# Altium PCB TEMPLATE_PCB_2L.PcbDoc
Units mm, origin at the board's own origin, x right, y up, seen from the top; angles counter-clockwise.
Board outline 430 x 290 mm, 2 copper layers (Top, Bottom), stack 1.54 mm thick; 75 components, 46 nets, 349 pads, 26 vias.
Unrouted connection lines stored in the file: 1.
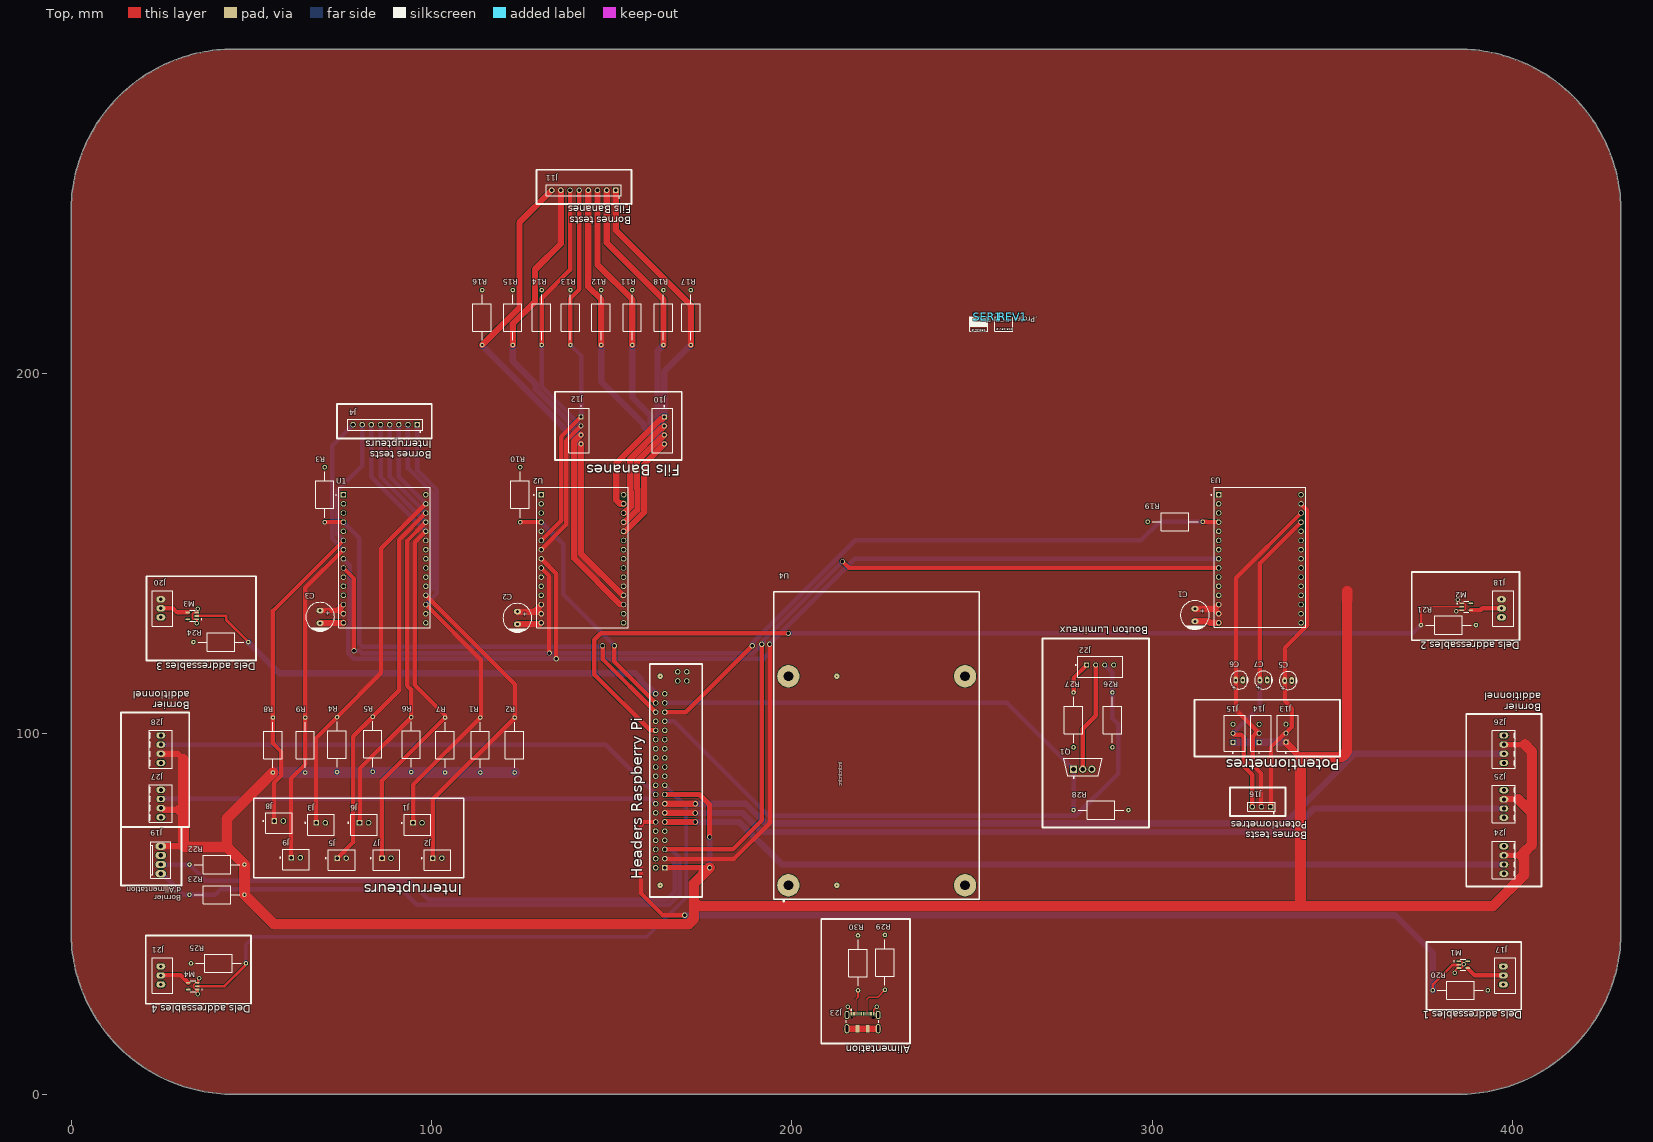
[diagram p0: Top view]
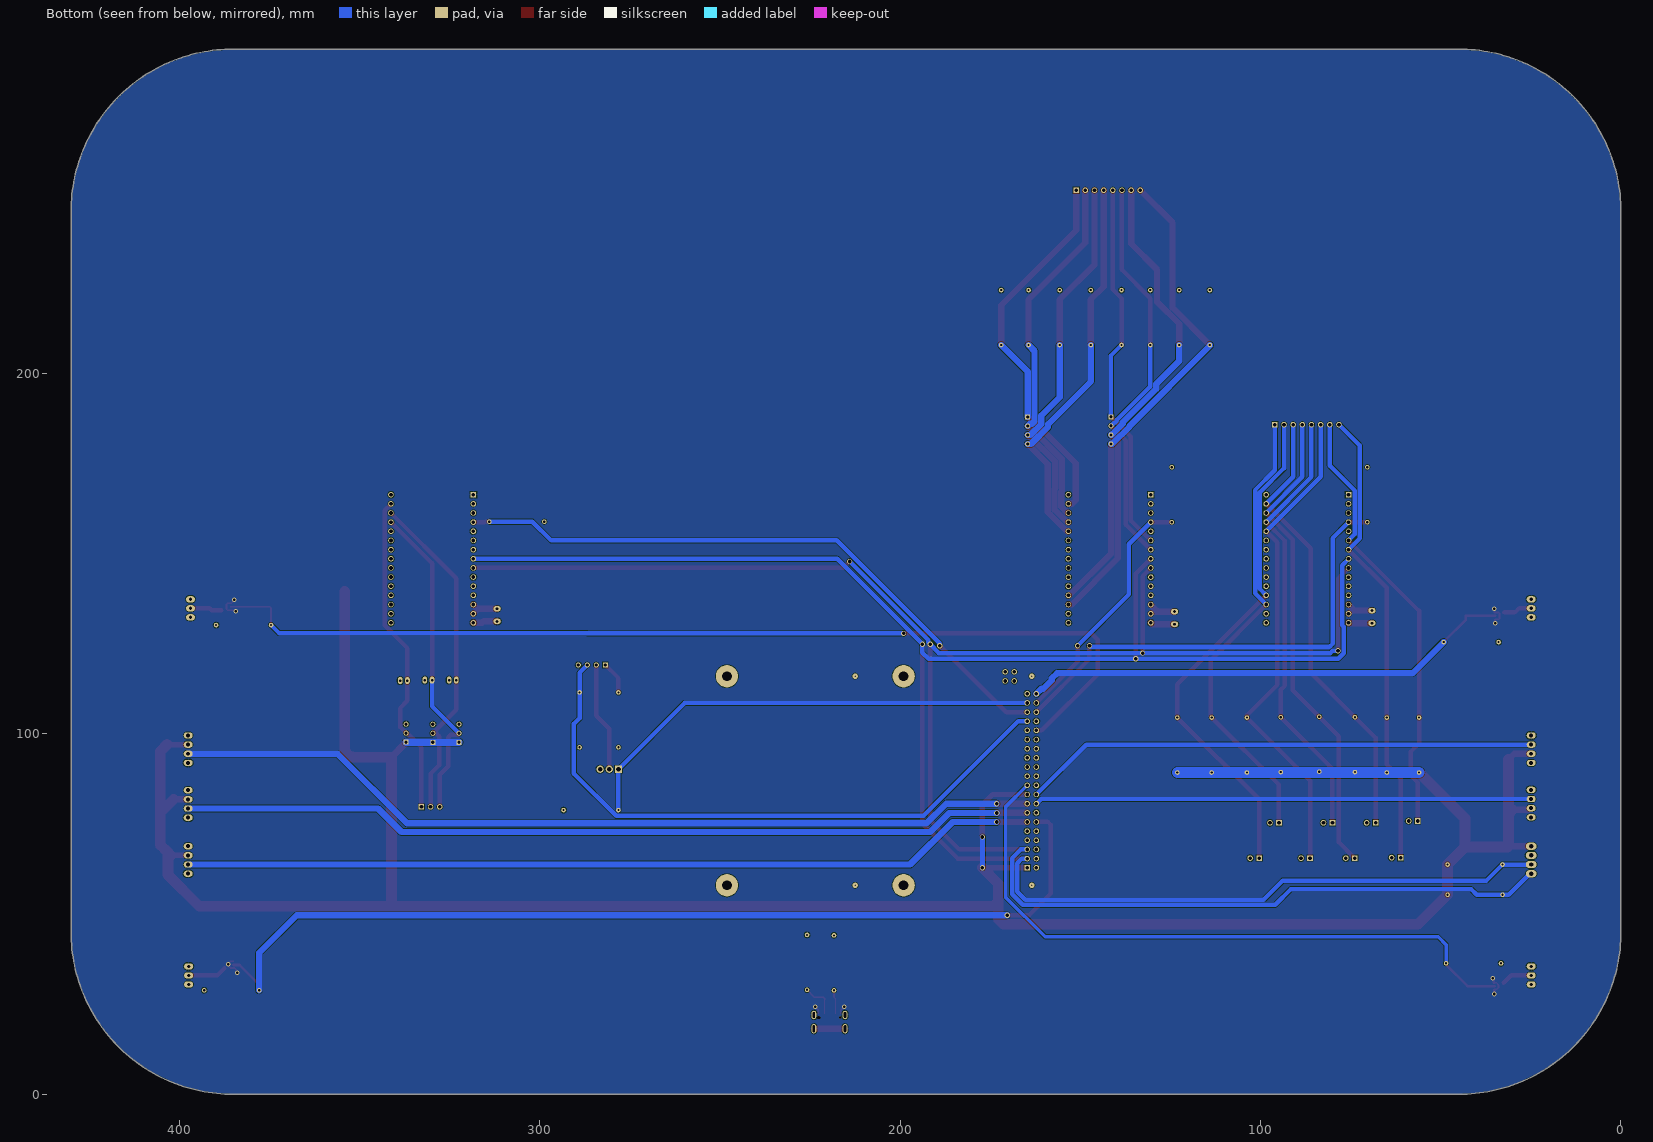
[diagram p1: Bottom view, seen from below]

## Layer stack, top to bottom
Top Solder: solder mask 0.0102, Solder Resist, Dk 3.5
Top: signal copper 0.035
Dielectric 1: core 1.47, FR-4, Dk 4.6
Bottom: signal copper 0.035
Bottom Solder: solder mask 0.0102, Solder Resist, Dk 3.5

## Board outline
0,45 0,245 cw(c45,245) 45,290 385,290 cw(c385,245) 430,245 430,45 cw(c385,45) 385,0 45,0 cw(c45,45)

## Design rules (kind name [scope] priority, off if disabled: settings)
BoardOutlineClearance [All] p1: gap=0.2 ignorepadtopadclearanceinfootprint=FALSE except(0: Arc-SplitContinuation Track-SplitContinuation SMDPad-SplitContinuation THPad-SplitContinuation Via-SplitContinuation Fill-SplitContinuation Poly-SplitContinuation Region-SplitContinuation Text-SplitContinuation)
Clearance [All] p1: gap=0.152 ignorepadtopadclearanceinfootprint=FALSE except(0: Arc-Hole Track-Hole SMDPad-Hole THPad-Hole Via-Hole Fill-Hole Poly-Hole Region-Hole Text-Hole; 0.127: Arc-Arc Arc-Track Track-Track SMDPad-Fill SMDPad-Poly SMDPad-Region; 0.2: Arc-SMDPad Track-SMDPad; 0.254: Arc-Via Track-Via Via-Via; 0.33: Arc-THPad Track-THPad; 0.5: THPad-THPad)
ComponentClearance [All] p1: gap=0.102 collisioncheckmode=3 verticalgap=0.102 showdistances=FALSE
HoleSize [All] p1: absolutevalues=TRUE maxlimit=6.3 minlimit=0.3 maxpercent=80.000 minpercent=20.000
HoleToHoleClearance [All] p1: gap=0.5 allowstackedmicrovias=FALSE
MinimumAnnularRing [All] p1: minimumring=0.1
MinimumSolderMaskSliver [All] p1: minsoldermaskwidth=0.1
PlaneClearance [All] p1: clearance=0.152
PlaneConnect [All] p1: pad.planeconnectstyle=Relief pad.reliefexpansion=0.508 pad.reliefentries=4 pad.reliefconductorwidth=0.254 pad.reliefairgap=0.254 via.planeconnectstyle=Direct via.reliefexpansion=0.508 via.reliefentries=4 via.reliefconductorwidth=0.254 via.reliefairgap=0.254
PolygonConnect [All] p1: thpad.connectstyle=Relief thpad.reliefconductorwidth=0.254 thpad.reliefentries=4 thpad.polygonreliefangle="90 Angle" thpad.airgapwidth=0.254 smdpad.connectstyle=Relief smdpad.reliefconductorwidth=0.254 smdpad.reliefentries=4 smdpad.polygonreliefangle="90 Angle" smdpad.airgapwidth=0.254 via.connectstyle=Direct via.reliefconductorwidth=0.254 via.reliefentries=4 via.polygonreliefangle="90 Angle" via.airgapwidth=0.254
RoutingVias [All] p1: holewidth=0.3 width=0.5 viastyle="Through Hole" minholewidth=0.3 minwidth=0.5 maxholewidth=6.3 maxwidth=6.5
SilkToSilkClearance [All] p1: silktosilkclearance=0.102
SilkToSolderMaskClearance [IsPad] p1: minsilkscreentomaskgap=0.024 clearancetoexposedcopper=FALSE
SolderMaskExpansion SolderMaskExpansion_Via [isVia] p1: expansion=0.102 istentingtop=TRUE
SolderMaskExpansion [All] p2: expansion=0.051 istentingtop=FALSE
Width [All] p1: maxlimit=25.4 minlimit=0.127 preferedwidth=0.152 minimp=50.000000 maximp=50.000000 favimp=50.000000
22 further rules are at their usual default settings.

## Classes and differential pairs
component class Alimentation_USB_Header: J23 R29 R30
component class Énigme3_Potentiomètres: C3 C5 C6 C7 J13 J14 J15 J16 R19 U3
component class Énigme2_Crocodile: C2 J10 J11 J12 R10 R11 R12 R13 R14 R15 R16 R17 R18 U2
component class Énigme1_Switch: C1 J1 J2 J3 J4 J5 J6 J7 J8 J9 R1 R2 R3 R4 R5 R6 R7 R8 R9 U1
component class Raspberry_Pi_4_ModelB: J17 J18 J19 J20 J21 J22 J24 J25 J26 J27 J28 ll M1 M2 M3 M4 Q1 R20 R21 R22 R23 R24 R25 R26 R27 R28 U4
component class Title_Page: REV1 SER1

## Components (designator, comment, footprint, x,y, rotation, side; value= is the part's Value field where it differs from the comment)
C1 "100 µF" "CAP AL TH D8 L3.5 H12.5" 311.785,132.969 r270 top
C2 "100 µF" "CAP AL TH D8 L3.5 H12.5" 123.825,132.179 r270 top
C3 "100 µF" "CAP AL TH D8 L3.5 H12.5" 69.088,132.461 r270 top
C5 "0.1µF" "CAP TH ALUM ELEC D5.00mm S2.00mm H12.00mm" 337.685,114.808 r180 top
C6 "0.1µF" "CAP TH ALUM ELEC D5.00mm S2.00mm H12.00mm" 324.104,114.944 r180 top
C7 "0.1µF" "CAP TH ALUM ELEC D5.00mm S2.00mm H12.00mm" 330.851,114.935 r180 top
J1 "B2B-XH-A(LF)(SN)" FP-B2B-XH-A_LF_SN-MFG 96.12,74.778 r0 top
J2 "B2B-XH-A(LF)(SN)" FP-B2B-XH-A_LF_SN-MFG 101.62,65.007 r0 top
J3 "B2B-XH-A(LF)(SN)" FP-B2B-XH-A_LF_SN-MFG 69.322,74.803 r0 top
J4 "CON_HDR_1X8" CON_HDR_1x8 87.122,185.801 r270 top
J5 "B2B-XH-A(LF)(SN)" FP-B2B-XH-A_LF_SN-MFG 75.077,65.007 r0 top
J6 "B2B-XH-A(LF)(SN)" FP-B2B-XH-A_LF_SN-MFG 81.28,74.803 r0 top
J7 "B2B-XH-A(LF)(SN)" FP-B2B-XH-A_LF_SN-MFG 87.503,65.007 r0 top
J8 "B2B-XH-A(LF)(SN)" FP-B2B-XH-A_LF_SN-MFG 57.658,75.303 r0 top
J9 "B2B-XH-A(LF)(SN)" FP-B2B-XH-A_LF_SN-MFG 62.377,65.134 r0 top
J10 "B4B-XH-A(LF)(SN)" FP-B4B-XH-A_LF_SN-MFG 164.067,184.17 r90 top
J11 "CON_HDR_1X8" CON_HDR_1x8 142.24,250.825 r270 top
J12 "B4B-XH-A(LF)(SN)" FP-B4B-XH-A_LF_SN-MFG 140.953,184.21 r90 top
J13 "B3B-XH-A(LF)(SN)" FP-B3B-XH-A_LF_SN-MFG 337.574,100.203 r90 top
J14 "B3B-XH-A(LF)(SN)" FP-B3B-XH-A_LF_SN-MFG 330.151,100.172 r90 top
J15 "B3B-XH-A(LF)(SN)" FP-B3B-XH-A_LF_SN-MFG 322.879,100.174 r90 top
J16 "CON_HDR_1X3" CON_HDR_1x3 330.258,79.756 r270 top
J17 "B3B-XH-A(LF)(SN)" "JST XH B3B-XH-A" 397.383,32.98 r90 top
J18 "B3B-XH-A(LF)(SN)" "JST XH B3B-XH-A" 396.875,134.83 r90 top
J19 "0022272041" "MOLEX KK 0022272041" 24.892,65.024 r270 top
J20 "B3B-XH-A(LF)(SN)" "JST XH B3B-XH-A" 24.892,134.83 r90 top
J21 "B3B-XH-A(LF)(SN)" "JST XH B3B-XH-A" 24.892,32.98 r90 top
J22 "B4B-XH-A(LF)(SN)" FP-B4B-XH-A_LF_SN-MFG 285.516,118.601 r180 top
J23 "DX07S016JA1R1500" FP-DX07S016JA1R1500-MFG 219.583,19.201 r0 top
J24 "282834-4" "TE 282834-4" 397.51,65.024 r270 top
J25 "282834-4" "TE 282834-4" 397.51,80.573 r270 top
J26 "282834-4" "TE 282834-4" 397.51,95.758 r270 top
J27 "282834-4" "TE 282834-4" 24.892,80.669 r90 top
J28 "282834-4" "TE 282834-4" 24.892,95.758 r90 top
M1 "74HC1G125GV-Q100H" SOT95P275X110-5N 386.207,35.965 r0 top
M2 "74HC1G125GV-Q100H" SOT95P275X110-5N 387.096,135.279 r0 top
M3 "74HC1G125GV-Q100H" SOT95P275X110-5N 33.655,132.739 r180 top
M4 "74HC1G125GV-Q100H" SOT95P275X110-5N 33.794,29.996 r180 top
Q1 "IRF520NPBF" FP-PG-TO220-3-MFG 280.67,90.805 r90 top
R1 "10 Kohm" Res_Template 113.538,104.521 r270 top
R2 "10 Kohm" Res_Template 123.063,104.521 r270 top
R3 "10 Kohm" Res_Template 70.358,158.75 r90 top
R4 "10 Kohm" Res_Template 73.788,104.648 r270 top
R5 "10 Kohm" Res_Template 83.694,104.775 r270 top
R6 "10 Kohm" Res_Template 94.362,104.648 r270 top
R7 "10 Kohm" Res_Template 103.759,104.521 r270 top
R8 "10 Kohm" Res_Template 56.007,104.521 r270 top
R9 "10 Kohm" Res_Template 64.947,104.521 r270 top
R10 "10 Kohm" Res_Template 124.587,158.75 r90 top
R11 "10 Kohm" Res_Template 155.702,223.139 r270 top
R12 "10 Kohm" Res_Template 147.066,223.139 r270 top
R13 "10 Kohm" Res_Template 138.557,223.139 r270 top
R14 "10 Kohm" Res_Template 130.556,223.139 r270 top
R15 "10 Kohm" Res_Template 122.555,223.139 r270 top
R16 "10 Kohm" Res_Template 114.046,223.139 r270 top
R17 "10 Kohm" Res_Template 171.958,223.139 r270 top
R18 "10 Kohm" Res_Template 164.347,223.139 r270 top
R19 "10 Kohm" Res_Template 313.944,158.877 r180 top
R20 "10 Kohm" Res_Template 393.065,28.853 r180 top
R21 "10 Kohm" Res_Template 389.763,130.199 r180 top
R22 "4.7 Kohm" Res_Template 32.852,63.754 r0 top
R23 "4.7 Kohm" Res_Template 48.086,55.372 r180 top
R24 "10 Kohm" Res_Template 33.948,125.476 r0 top
R25 "10 Kohm" Res_Template 33.274,36.346 r0 top
R26 "4.7 Kohm" Res_Template 288.925,111.506 r270 top
R27 "90 ohm" Res_Template 278.13,111.506 r270 top
R28 "4.7 Kohm" Res_Template 293.37,78.867 r180 top
R29 "5.1 Kohm" Res_Template 225.806,44.22 r270 top
R30 "5.1 Kohm" Res_Template 218.333,44.093 r270 top
REV1 "Revision Cartridge Mini" REV_REVISION_CARTRIDGE_MINI 261.239,215.773 r180 top
SER1 "Serial Cartridge MICRO" SER_SERIAL_CARTRIDGE_MICRO 254.381,215.773 r180 top
U1 "ESP32-C3-DEVKITC-02" XCVR_ESP32-C3-DEVKITC-02 86.995,148.971 r0 top
U2 "ESP32-C3-DEVKITC-02" XCVR_ESP32-C3-DEVKITC-02 141.859,148.971 r0 top
U3 "ESP32-C3-DEVKITC-02" XCVR_ESP32-C3-DEVKITC-02 329.819,148.978 r0 top
U4 "RASPBERRY_PI_4B_4GB" MODULE_RASPBERRY_PI_4B_4GB 187.949,96.995 r90 top

## Footprints (in the part's own frame and the unit in brackets; to place one, negate y for a bottom-side part, rotate by r counter-clockwise, add the part's x,y. Pads: shape width x height; smd on the part's side, far side on the other; paste and mask are expansions set on the pad)
"CAP AL TH D8 L3.5 H12.5" [mm] "8MM Diameter, 3.5MM Lead Spacing Aluminium Capacitor"
  oval 1.5x2 hole 0.8: 1(-1.75,0) 2(1.75,0)
  silkscreen extent -4,-4 4,4, body extent -4,-4 4,4, height 11.5
"CAP TH ALUM ELEC D5.00mm S2.00mm H12.00mm" [mm] "5mm Diameter 2mm Lead Spacing Aluminum Electrolytic Capacitors Radial, Can"
  oval 1.3x1.95 hole 0.7: 1(1,0) 2(-1,0)
  silkscreen extent -2.5,-2.5 2.5,2.5, body extent -2.51,-2.5 2.5,2.5, height 12
CON_HDR_1x3 [mil]
  rect 60x60 hole 40: 1(0,100)
  round 60 hole 40: 2(0,0) 3(0,-100)
  silkscreen extent -50,-150 75,150, body extent -49,-150 49,150, height 338
CON_HDR_1x8 [mil]
  rect 60x60 hole 40 mask+2.76: 1(0,350)
  round 60 hole 40 mask+2.76: 2(0,250) 3(0,150) 4(0,50) 5(0,-50) 6(0,-150) 7(0,-250) 8(0,-350)
  silkscreen extent -60,-410 85,410, body extent -50,-400 50,400, height 334
FP-B2B-XH-A_LF_SN-MFG [mm]
  rect 1.55x1.55 hole 1 paste-2539.97 mask+0: 1(-1.25,0.525)
  round 1.55 hole 1 paste-2539.97 mask+0: 2(1.25,0.525)
  silkscreen extent -4.5,-2.88 3.7,2.88, body extent -3.8,-2.98 3.8,2.98, height 0.25
FP-B3B-XH-A_LF_SN-MFG [mm]
  rect 1.4x1.4 hole 0.9 paste-2539.97 mask+0: 1(-2.5,0.525)
  round 1.4 hole 0.9 paste-2539.97 mask+0: 2(0,0.525) 3(2.5,0.525)
  silkscreen extent -5.6,-2.88 4.95,2.88, body extent -5.05,-2.98 5.05,2.98, height 0.25
FP-B4B-XH-A_LF_SN-MFG [mm]
  rect 1.4x1.4 hole 0.9 paste-2539.97 mask+0: 1(3.75,-0.525)
  round 1.4 hole 0.9 paste-2539.97 mask+0: 2(1.25,-0.525) 3(-1.25,-0.525) 4(-3.75,-0.525)
  silkscreen extent -6.2,-2.88 6.87,2.88, body extent -6.3,-2.98 6.3,2.98, height 0.25
FP-DX07S016JA1R1500-MFG [mm]
  rrect100% 1.3x2.3 hole 1.6 slot 0.6 at 0 deg paste-2539.97 mask+0: 1(-4.32,2.825) 2(4.32,2.825)
  rrect100% 1.3x2.6 hole 1.9 slot 0.6 at 0 deg paste-2539.97 mask+0: 3(-4.32,-1) 6(4.32,-1)
  rect 1x2 smd paste+0 mask+0: 4(-1.4,-1) 5(1.4,-1)
  rect 0.52x1 smd paste+0 mask+0: A1/B12(-3.1,3.2) A4/B9(-2.35,3.2) A12/B1(3.1,3.2) B4/A9(2.35,3.2)
  rect 0.27x1 smd paste+0 mask+0: A5(-1.75,3.2) A6(-0.25,3.2) A7(0.75,3.2) A8(1.75,3.2) B5(1.25,3.2) B6(0.25,3.2) B7(-0.75,3.2) B8(-1.25,3.2)
  round 0.6 hole 0.6 unplated paste-2539.97 mask+0: ""(-3,2.1)
  rrect100% 0.85x0.6 hole 0.6 slot 0.85 at 0 deg unplated paste-2539.97 mask+0: ""(3,2.1)
  silkscreen extent -4.52,0.67 4.52,4.37, body extent -5.07,-3.75 5.07,4.08, height 0.25
FP-PG-TO220-3-MFG [mm]
  rect 2x2 hole 1.3 paste-2539.97 mask+0: 1(-0.61,2.54)
  round 2 hole 1.3 paste-2539.97 mask+0: 2(-0.61,0) 3(-0.61,-2.54)
  silkscreen extent -3.1,-5.38 2.41,5.38, body extent -2.51,-5.48 2.51,5.48, height 0.25
"JST XH B3B-XH-A" [mm]
  oval 1.75x2.5 hole 0.9: 1(-2.5,0) 2(0,0) 3(2.5,0)
  silkscreen extent -4.95,-3.38 4.95,2.38, body extent -4.95,-3.38 4.95,2.38, height 7
MODULE_RASPBERRY_PI_4B_4GB [mil]
  rect 60x60 / inner round 60 / far side rect 60x60 hole 40: 1(-1343.7,914.57)
  round 60 hole 40: 2(-1343.7,1014.57) 3(-1243.7,914.57) 4(-1243.7,1014.57) 5(-1143.7,914.57) 6(-1143.7,1014.57) 7(-1043.7,914.57) 8(-1043.7,1014.57) 9(-943.7,914.57) 10(-943.7,1014.57) 11(-843.7,914.57) 12(-843.7,1014.57) 13(-743.7,914.57) 14(-743.7,1014.57) 15(-643.7,914.57) 16(-643.7,1014.57) 17(-543.7,914.57) 18(-543.7,1014.57) 19(-443.7,914.57) 20(-443.7,1014.57) 21(-343.7,914.57) 22(-343.7,1014.57) 23(-243.7,914.57) 24(-243.7,1014.57) 25(-143.7,914.57) 26(-143.7,1014.57) 27(-43.7,914.57) 28(-43.7,1014.57) 29(56.3,914.57) 30(56.3,1014.57) 31(156.3,914.57) 32(156.3,1014.57) 33(256.3,914.57) 34(256.3,1014.57) 35(356.3,914.57) 36(356.3,1014.57) 37(456.3,914.57) 38(456.3,1014.57) 39(556.3,914.57) 40(556.3,1014.57) 41(796.46,673.5) 42(796.46,773.5) 43(696.46,673.5) 44(696.46,773.5)
  round 59.06 hole 19.68: S1(-1535.43,964.57) S2(748.03,964.57) S4(-1535.43,-964.57) ""(748.03,-964.57)
  silkscreen extent -1717,-393 -1701,-378
"MOLEX KK 0022272041" [mm]
  oval 2x3 hole 1.2: 1(-3.81,0) 2(-1.27,0) 3(1.27,0) 4(3.81,0)
  silkscreen extent -5.08,-2.79 5.08,2.79, body extent -5.08,-2.9 5.08,2.9, height 11.7
Res_Template [mm]
  round 1.27 hole 0.635: 1(0,0) 2(15.24,0)
  silkscreen extent 1.27,-2.54 13.97,2.54
REV_REVISION_CARTRIDGE_MINI [mm]
  silkscreen extent 0,0 5,4.08
SER_SERIAL_CARTRIDGE_MICRO [mm]
  silkscreen extent 0,0 5.02,4.08
SOT95P275X110-5N [mm]
  rrect25% 1.22x0.5 smd: 1(-1.245,0.95) 2(-1.245,0) 3(-1.245,-0.95) 4(1.245,-0.95) 5(1.245,0.95)
  silkscreen extent -2.6,-1.52 0.75,1.52, body extent -1.38,-1.45 1.38,1.45, height 1.1
"TE 282834-4" [mm]
  oval 1.75x2.5 hole 1.1: 1(-3.81,0) 2(-1.27,0) 3(1.27,0) 4(3.81,0)
  silkscreen extent -5.24,-3.2 5.24,3.2, body extent -5.31,-3.25 5.31,3.25, height 10
XCVR_ESP32-C3-DEVKITC-02 [mm]
  rect 1.53x1.53 hole 1.02: 1(-11.43,17.392)
  round 1.53 hole 1.02: 2(-11.43,14.852) 3(-11.43,12.312) 4(-11.43,9.772) 5(-11.43,7.232) 6(-11.43,4.692) 7(-11.43,2.152) 8(-11.43,-0.388) 9(-11.43,-2.928) 10(-11.43,-5.468) 11(-11.43,-8.008) 12(-11.43,-10.548) 13(-11.43,-13.088) 14(-11.43,-15.628) 15(-11.43,-18.168) 16(11.43,-18.168) 17(11.43,-15.628) 18(11.43,-13.088) 19(11.43,-10.548) 20(11.43,-8.008) 21(11.43,-5.468) 22(11.43,-2.928) 23(11.43,-0.388) 24(11.43,2.152) 25(11.43,4.692) 26(11.43,7.232) 27(11.43,9.772) 28(11.43,12.312) 29(11.43,14.852) 30(11.43,17.392)
  silkscreen extent -13.56,-19.46 12.7,19.46

## Part data
C1 C2 C3: library part 860020674015, "CAP ALUM 100UF 20% 50V RADIAL", Device Package="Radial, Can", Lifetime @ Temp.="2000 Hrs @ 105°C", manufacturer="Würth Elektronik", Operating Temperature="-40°C ~ 105°C", Ripple Current @ High Frequency="306 mA @ 100 kHz", Ripple Current @ Low Frequency="200 mA @ 120 Hz", Supplier Part Number 1=732-8861-1-ND, Tolerance=±20%, Voltage - Rated="50 V", Applications="General Purpose", Capacitance="100 µF", ComponentLink1Description=Datasheet, ComponentLink1URL=https://katalog.we-online.de/pbs/datasheet/860020674015.pdf, componentlink2description="DigiKey Link", componentlink2url=https://www.digikey.com/en/products/detail/würth-elektronik/860020674015/5727098, Height - Seated (Max)="0.492\" (12.50mm)", lastupdated="2024-06-03 20:06:11", Lead Spacing="0.138\" (3.50mm)", Lifecycle Status=Active, Minimum Order=1, Mounting Type="Through Hole", Package / Case="Radial, Can", Packaging=TapeAndBox, Part Number=860020674015, Part Status=Active, partid=7238, Polarization=Polar, Price=0.16, Series=WCAP-ATG5, Size / Dimension="0.315\" Dia (8.00mm)", Supplier 1=DigiKey
C5 C6 C7: library part UKL2A0R1KDD, "CAP ALUM 0.1UF 10% 100V RADIAL", Device Package="Radial, Can", Lifetime @ Temp.="2000 Hrs @ 85°C", manufacturer=Nichicon, Operating Temperature="-40°C ~ 85°C", Ripple Current @ High Frequency="4.2mA @ 10kHz", Ripple Current @ Low Frequency="2.1mA @ 120Hz", Supplier Part Number 1=493-16876-ND, Tolerance=±10%, Voltage - Rated=100V, Applications="General Purpose", Capacitance=0.1µF, ComponentLink1Description=Datasheet, ComponentLink1URL=http://nichicon-us.com/english/products/pdfs/e-ukl.pdf, componentlink2description="DigiKey Link", componentlink2url=http://digikey.com/product-detail/en/nichicon/UKL2A0R1KDD/493-16876-ND/2598554, Height - Seated (Max)="0.472\" (12.00mm)", lastupdated="2020-09-04 23:28:57", Lead Spacing="0.079\" (2.00mm)", Lifecycle Status=Active, Minimum Order=1, Mounting Type="Through Hole", Package / Case="Radial, Can", Packaging=Bulk, Part Number=UKL2A0R1KDD, Part Status=Active, partid=21583, Polarization=Polar, Price=0.39, Series=UKL, Size / Dimension="0.197\" Dia (5.00mm)", Supplier 1=DigiKey
J1 J2 J3 J5 J6 J7 J8 J9: library part CMP-2000-05888-3, "CONN HEADER VERT 2POS 2.5MM", Color=Natural, Contact Resistance=20mR, Current Rating=3A, Housing Color=White, Insulation Resistance=1GR, Max Operating Temperature=85°C, Max Voltage Rating (AC)=250V, Min Operating Temperature=-25°C, Connector Type="Male Pin", Contact Material=Brass, Contact Plating=Tin, Contact Type="Male Pin", Depth=5.75mm, Fastening Type=Detent, Housing Material=Polyamide, Lead Free="Lead Free", Lead Pitch=2.5mm, Length=7.4mm, Max Current Rating=3A, Max Voltage Rating (DC)=250V, Mount="Through Hole", Number of Contacts=2, Number of Positions=2, Number of Rows=1, Orientation=Straight, Packaging=Bulk, Pitch=2.5mm, REACH SVHC="No SVHC", Series=XH, Termination=Solder, Voltage Rating=250V, Voltage Rating (AC)=250V, Wire/Cable Gauge=22AWG
J4 J11: library part CMP-005-000004-1, "CON - Header 1X8 pins, 100Mils - TH-8", Package=TH-8, Assembly Type=TH, Component Type=Standard, Design Item ID=CON_HDR_1X8, Pin Count=8, Polarized=No, Source=CEGEP_SHERBROOKE_TGE_LIBRARY.SchLib
J10 J12 J22: library part CMP-17439-000250-1, "CONN HEADER VERT 4POS 2.5MM", Color=Natural, Contact Resistance=20mR, Current Rating=3A, Flammability Rating="UL94 V-0", Housing Color=White, Insulation Resistance=1GR, Max Operating Temperature=85°C, Max Voltage Rating (AC)=250V, Min Operating Temperature=-25°C, Package Quantity=500, Connector Type=Header, Contact Finish - Mating=TIN, Contact Material=Brass, Contact Plating=Tin, Contact Shape=Square, Contact Type="Male Pin", Depth=5.75mm, Fastening Type=Detent, Gender=Male, Housing Material=Polyamide, Insulation Color=Natural, Insulation Material=Nylon, Lead Free="Lead Free", Lead Pitch=2.5mm, Length=12.4mm, Mated Stacking Heights=9.8mm, Material=Polyamide, Max Current Rating=3A, Max Voltage Rating (DC)=250V, Mount="Through Hole", Number of Contacts=4, Number of Positions=4, Number of Rows=1, Orientation=Straight, Packaging=Bulk, Pitch=2.5mm, REACH SVHC="No SVHC", Series=XH, Termination=Solder, Voltage Rating=250V, Voltage Rating (AC)=250V, Wire/Cable Gauge=22AWG
J13 J14 J15: library part CMP-17439-000014-3, "CONN HEADER VERT 3POS 2.5MM", Color=Natural, Contact Resistance=20mR, Current Rating=3A, Flammability Rating="UL94 V-0", Housing Color=White, Insulation Resistance=1GR, Max Operating Temperature=85°C, Max Voltage Rating (AC)=250V, Min Operating Temperature=-25°C, Connector Type=Header, Contact Finish - Mating=TIN, Contact Material=Brass, Contact Plating=Tin, Contact Shape=Square, Contact Type="Male Pin", Depth=5.75mm, Fastening Type=Detent, Gender=Male, Housing Material=Polyamide, Insulation Color=Natural, Insulation Material=Nylon, Lead Free="Lead Free", Lead Pitch=2.5mm, Length=9.9mm, Max Current Rating=3A, Max Voltage Rating (DC)=250V, Mount="Through Hole", Number of Contacts=3, Number of Positions=3, Number of Rows=1, Orientation=Straight, Packaging=Bulk, Pitch=2.5mm, REACH SVHC="No SVHC", Series=XH, Termination=Solder, Voltage Rating=250V, Voltage Rating (AC)=250V, Wire/Cable Gauge=22AWG
J16: library part CMP-005-000001-1, "CON - Header 1x3 pins-100Mils - TH", Package=TH, Assembly Type=TH, Component Type=Standard, Design Item ID=CON_HDR_1X3, Pin Count=3, Polarized=No, Source=CEGEP_SHERBROOKE_TGE_LIBRARY.SchLib
J17 J18 J20 J21: "CONN HEADER VERT 3POS 2.5MM", Current Rating (Amps)=3A, Insulation Color=Natural, manufacturer="JST Sales America Inc.", Material Flammability Rating="UL94 V-0", Operating Temperature="-25°C ~ 85°C", Supplier Part Number 1=455-2248-ND, Voltage Rating=250V, ComponentLink1Description=Datasheet, ComponentLink1URL=http://www.jst-mfg.com/product/pdf/eng/eXH.pdf, componentlink2description="DigiKey Link", componentlink2url=http://digikey.com/product-detail/en/jst-sales-america-inc/B3B-XH-A-LF-SN/455-2248-ND/1651046, Connector Type=Header, Contact Finish - Mating=Tin, Contact Finish - Post=Tin, Contact Length - Post="0.134\" (3.40mm)", Contact Material=Brass, Contact Shape=Square, Contact Type="Male Pin", Fastening Type="Detent Lock", Insulation Height="0.276\" (7.00mm)", Insulation Material="Polyamide (PA66), Nylon 6/6", lastupdated="2020-01-12 23:46:22", Lifecycle Status=Active, Minimum Order=1, Mounting Type="Through Hole", Number of Positions=3, Number of Positions Loaded=All, Number of Rows=1, Packaging=Bulk, Part Number=B3B-XH-A(LF)(SN), Part Status=Active, partid=68, Pitch - Mating="0.098\" (2.50mm)", Price=0.19, Series=XH, Shrouding="Shrouded - 4 Wall", Style="Board to Cable/Wire", Supplier 1=DigiKey, Termination="Press-Fit, Solder"
J19: "CONN HEADER VERT 4POS 2.54MM", Part Number=0022272041
J23: library part CMP-19038-000003-1, "CONN RCP USB2.0 TYP C 24P SMD RA"
J24 J25 J26 J27 J28: "TERM BLK 4P SIDE ENT 2.54MM PCB", Color=Green, Current=10A, manufacturer="TE Connectivity AMP Connectors", Supplier Part Number 1=A98335-ND, Voltage=150V, ComponentLink1Description=Datasheet, ComponentLink1URL=https://www.te.com/commerce/DocumentDelivery/DDEController?Action=srchrtrv&DocNm=282834&DocType=Customer+Drawing&DocLang=English, componentlink2description="DigiKey Link", componentlink2url=http://digikey.com/product-detail/en/te-connectivity-amp-connectors/282834-4/A98335-ND/1153265, lastupdated="2020-01-15 04:16:05", Lifecycle Status=Active, Mating Orientation="Horizontal with Board", Minimum Order=1, Mounting Type="Through Hole", Number of Levels=1, Packaging=Bulk, Part Number=282834-4, Part Status=Active, Pitch="0.100\" (2.54mm)", Positions Per Level=4, Price=2.68, Series=Buchanan, Supplier 1=DigiKey, Wire Gauge="16-30 AWG", Wire Termination="Screw - Rising Cage Clamp"
M1 M2 M3 M4: library part "74HC1G125GV-Q100H NXP Semiconductors", "Bus Driver, HC/UH Series, 1-Func, 1-Bit, True Output, CMOS, PDSO5", Supply Voltage-Max=6V, Supply Voltage-Min=2V, Supply Voltage-Nominal=5V, ComponentLink1Description="New link", ComponentLink1URL=https://www.snapeda.com/parts/74HC1G125GV-Q100H/Nexperia/view-part/?welcome=home&ref=octopart, Surface Mount=Yes
Q1: library part CMP-32901-000276-1, "MOSFET N-CH 100V 9.7A TO-220AB", Case/Package=TO-220, Continuous Drain Current (ID)=9.7A, Drain To Source Breakdown Voltage=100V, Drain To Source Resistance=200mR, Gate to Source Voltage (Vgs)=20V, Input Capacitance=330pF, Max Operating Temperature=175°C, Max Power Dissipation=48W, Min Operating Temperature=-55°C, Threshold Voltage=4V, Contact Plating=Tin, Drain to Source Voltage (Vdss)=100V, Element Configuration=Single, Halogen Free="Halogen Free", Height=0.6inch, Lead Free="Lead Free", Length=0.414inch, Max Dual Supply Voltage=100V, Mount="Through Hole", Number of Pins=3, Packaging=Rail/Tube, Power Dissipation=48W, Rds On Max=200mR, REACH SVHC="No SVHC", Rise Time=23ns, RoHS Compliant=Yes, Turn-Off Delay Time=32ns, Turn-On Delay Time=4.5ns, Width=0.185inch
R1 R2 R3 R4 R5 R6 R7 R8 R9 R10 R11 R12 R13 R14 R15 R16 R17 R18 R19 R20 R21 R22 R23 R24 R25 R26 R27 R28 R29 R30: library part "470 ohm", "Custom Semiconductor Resistor"
REV1: library part REV_REVISION_CARTRIDGE_MINI, "REV - REVISION CARTRIDGE MINI", Assembly Type=NONE, Rule="Component Clearance Constraint [Horizontal Clearance = 0mil    Vertical Clearance = 0mil]"
SER1: library part SER_SERIAL_CARTRIDGE_MICRO, "SER - SERIAL CARTRIDGE MICRO", Assembly Type=NONE, Rule="Component Clearance Constraint [Horizontal Clearance = 0mil    Vertical Clearance = 0mil]"
U1 U2 U3: "Development Boards & Kits - Wireless (Engineering Samples) ESP32-C3 General-Purpose Development Board, embeds ESP32-C3-WROOM-02, 4 MB Flash, with Pin Header", Package=None, Availability="In Stock", Check_prices=https://www.snapeda.com/parts/ESP32-C3-DevKitC-02/Espressif+Systems/view-part/?ref=eda, ComponentLink1Description="New link", ComponentLink1URL=https://docs.espressif.com/projects/esp-idf/en/v5.2/esp32c3/hw-reference/esp32c3/user-guide-devkitc-02.html, MF="Espressif Systems", MP=ESP32-C3-DevKitC-02, Price=12.94$, Purchase-URL=https://www.digikey.ca/en/products/detail/espressif-systems/ESP32-C3-DEVKITC-02/14553009?gclsrc=aw.ds&&utm_adgroup=&utm_source=google&utm_medium=cpc&utm_campaign=PMax%20Product_Low%20ROAS%20Categories&utm_term=&productid=14553009&utm_content=&utm_id=go_cmp-20291741422_adg-_ad-__dev-c_ext-_prd-14553009_sig-CjwKCAiAh6y9BhBREiwApBLHC_cF2gDRygapSaJLXU2Wdnx3_ghIaBBBCKe6dQeqHq45MeITmry7OBoCG4EQAvD_BwE&gad_source=1&gclid=CjwKCAiAh6y9BhBREiwApBLHC_cF2gDRygapSaJLXU2Wdnx3_ghIaBBBCKe6dQeqHq45MeITmry7OBoCG4EQAvD_BwE, SnapEDA_Link=https://www.snapeda.com/parts/ESP32-C3-DevKitC-02/Espressif+Systems/view-part/?ref=snap
U4: "BCM2711 Raspberry Pi 4 Model B 4GB - ARMÂ® CortexÂ®-A72 MPU Embedded Evaluation Board", Package=None, Availability="In Stock", Check_prices=https://www.snapeda.com/parts/RASPBERRY%20PI%204B/4GB/Raspberry+Pi/view-part/?ref=eda, MF="Raspberry Pi", MP="RASPBERRY PI 4B/4GB", Price=None, Purchase-URL="https://pricing.snapeda.com/search/part/RASPBERRY PI 4B/4GB/?ref=eda", SnapEDA_Link=https://www.snapeda.com/parts/RASPBERRY%20PI%204B/4GB/Raspberry+Pi/view-part/?ref=snap

## Free pads (board coordinates)
  round 6.2 hole 2.75: 2(199.009,57.995) 2(199.009,115.995) 2(248.031,57.995) 2(248.031,115.995)

## Via types
v1: diameter 1.45, hole 1, Top to Bottom, tented both sides, 16 vias
v2: diameter 1.27, hole 0.711, Top to Bottom, tented both sides, 10 vias

## Nets (pads, with @x,y where several pads share a name; then routed paths per layer and width w, separated by ;. In a path a pad name is that pad's centre, name@x,y a point inside that pad or via, vN(x,y) a via of type N, cw(c..) or ccw(c..) an arc to the next point about the centre after c; other vN are vias at no path point)
3V3: J13.1 J14.1 J15.1 J19.1 J24.2 J25.2 J26.2 J27.2 J28.2 R1.2 R2.2 R3.2 R4.2 R5.2 R6.2 R7.2 R8.2 R9.2 R10.2 R19.2 R22.2 R23.1 U4.1 U4.17 | length 765.9
  Top w1.5: U4.1 v1(177.165,62.865) ; U4.17 174.356,83.185 177.165,80.376 v1(177.165,71.399) ; J24.2 402.336,66.294 ; J26.2 403.352,97.028
  Top w1.75: J19.1 31.221,68.834 31.475,68.58 ; J27.2 25.267,79.399 25.727,78.939 30.051,78.939 ; J28.2 29.591,94.488 31.221,92.858 ; J25.2 401.519,81.843
  Top w2: J13.1@337.142,97.524 341.122,93.543
  Top w3: 30.051,78.939 31.221,77.768 ; 31.221,68.834 31.221,77.768 ; 31.221,92.858 31.221,77.768 ; 31.475,68.58 43.266,68.58 ; R8.2 43.266,76.54 43.266,68.58 ; v1(177.165,62.865) 172.737,58.437 172.737,53.534 ; 354.076,139.573 354.076,96.083 cw(c351.536,96.083) 351.536,93.543 341.122,93.543 341.122,52.197 ; 401.519,81.843 405.257,78.105 ; 402.336,66.294 403.098,67.056 ; 403.352,97.028 405.257,95.123 405.257,78.105 ; 43.266,68.58 R22.2 48.086,63.749 R23.1 56.28,47.178 171.285,47.178 172.737,48.63 172.737,53.534 ; 172.737,53.534 174.074,52.197 341.122,52.197 ; 341.122,52.197 394.462,52.197 403.098,60.833 403.098,67.056 ; 403.098,67.056 405.257,69.215 405.257,78.105
  Bottom w1.5: v1(177.165,62.865) v1(177.165,71.399)
  Bottom w2: J15.1 322.356,97.672 J14.1 329.657,97.703 J13.1
  Bottom w3: R8.2 R9.2 R6.2@94.362,89.281 ; R6.2@94.489,89.281 R7.2 R1.2 R2.2
GND: C1.2 C2.2 C3.2 C5.2 C6.2 C7.2 J1.2 J2.2 J3.2 J5.2 J6.2 J7.2 J8.2 J9.2 J13.3 J14.3 J15.3 J17.3 J18.3 J19.2 J20.3 J21.3 J22.4 J23.1 J23.2 J23.3 J23.4 J23.5 J23.6 J23.A1/B12 J23.A12/B1 J24.4 J25.4 J26.4 J27.4 J28.4 M1.1 M1.3 M2.1 M2.3 M3.1 M3.3 M4.1 M4.3 Q1.3 R11.1 R12.1 R13.1 R14.1 R15.1 R16.1 R17.1 R18.1 R20.1 R21.1 R24.1 R25.1 R28.1 R29.1 R30.1 U1.1 U1.5 U1.10 U1.15 U1.16 U1.17 U1.20 U1.23 U1.25 U1.30 U2.1 U2.5 U2.10 U2.15 U2.16 U2.17 U2.20 U2.23 U2.25 U2.30 U3.1 U3.5 U3.10 U3.15 U3.16 U3.17 U3.20 U3.23 U3.25 U3.30 U4.6 U4.9 U4.14 U4.20 U4.25 U4.30 U4.34 U4.39 | length 59
  Top w0.45: J23.A1/B12 216.483,23.317 ; J23.A12/B1 222.683,23.444
  Top w0.5: R25.1@33.066,36.346 R25.1 ; v2(34.9,130.659) M3.1 33.948,131.789 33.655,132.082 33.655,133.396 33.948,133.689 M3.3 35.04,133.689 35.04,134.631 v2(35.179,134.771) ; M4.3 34.529,30.946 33.979,30.396 33.979,29.596 34.404,29.171 34.554,29.171 34.679,29.046 M4.1 M4.1@35.094,29.046 ; v2@35.094,27.892 v2(35.149,27.837) ; v2(215.519,24.281) 216.483,23.317 ; 222.683,23.444 v2(223.52,24.281) ; v2(383.921,33.679) 384.068,33.826 384.068,34.481 384.602,35.015 M1.3 385.729,35.015 386.022,35.308 v2@386.022,36.075 ; v2(384.302,134.009) 384.51,134.009 384.83,134.329 M2.3 386.588,134.329 386.911,134.652 386.911,135.906 386.588,136.229 M2.1 385.491,136.229 384.696,137.024 v2(384.696,137.184) ; M1.1 385.729,36.915 386.022,36.622 v2@386.022,36.075 ; v2(386.359,36.075) v2@386.022,36.075
  Top w0.75: M4.3 35.149,30.946 35.274,31.071 35.274,31.702 35.586,32.014 v2(35.586,32.155) ; v2@35.094,27.892 M4.1@35.094,29.046
  Top w1.75: C3.2 75.473,130.711 U1.15 ; C2.2 130.055,130.429 U2.15 ; J23.3 J23.4 J23.5 J23.6 ; C1.2 315.576,131.219 315.985,130.81 U3.15
NetJ17_2: J17.2 M1.4 | length 10.9
  Top w1.25: M1.4 389.486,32.981 J17.2@397.494,32.981
NetJ18_2: J18.2 M2.4 | length 8.7
  Top w1.25: M2.4 391.012,134.329 391.518,134.835 396.87,134.835 J18.2
NetJ20_2: J20.2 M3.4 | length 8.1
  Top w1.25: J20.2@24.74,134.83 28.26,134.83 29.401,133.689 M3.4
NetJ21_2: J21.2 M4.4 | length 8.7
  Top w1.25: J21.2@24.765,33.064 30.431,33.064 M4.4
NetJ22_1: J22.1 R27.1 | length 9.1
  Top w1.25: R27.1 278.13,115.49 J22.1
NetJ22_2: J22.2 Q1.2 | length 30.4
  Top w1.25: Q1.2 280.67,101.42 284.266,105.016 J22.2
NetJ23_A5: J23.A5 R30.2 | length 6.7
  Top w0.25: J23.A5 217.833,26.456
  Top w0.5: 217.833,26.456 218.333,26.956 R30.2
NetJ23_B5: J23.B5 R29.2 | length 10.1
  Top w0.25: J23.B5 220.833,26.456
  Top w0.5: 220.833,26.456 221.333,26.956 223.782,26.956 R29.2
PIN_CROCO_0: J10.1 J11.1 R17.2 U2.29 | length 105.9
  Top w1.75: J11.1 151.13,239.776 171.958,218.948 R17.2 ; U2.29 152.282,163.823 151.257,164.848 151.257,175.088 163.494,187.325 163.997,187.325 J10.1
  Bottom w1.75: J10.1 164.592,200.533 R17.2
PIN_CROCO_1: J10.2 J11.2 R18.2 U2.28 | length 103.1
  Top w1.75: J11.2 148.59,236.294 164.347,220.537 R18.2 ; U2.28 153.535,161.283 155.259,163.007 155.259,167.179 155.095,167.343 155.095,176.272 163.648,184.825 163.997,184.825 J10.2
  Bottom w1.75: R18.2 162.687,206.239 162.687,186.721 163.393,186.015 163.997,186.015 J10.2
PIN_CROCO_2: J10.3 J11.3 R11.2 U2.27 | length 105.3
  Top w1.75: J11.3 146.05,230.189 155.702,220.537 R11.2 ; U2.27 153.649,158.743 157.136,162.23 157.136,167.957 156.972,168.121 156.972,175.494 163.803,182.325 163.997,182.325 J10.3
  Bottom w1.75: R11.2 155.702,193.421 160.81,188.313 160.81,185.943 163.833,182.92 J10.3
PIN_CROCO_3: J10.4 J11.4 R12.2 U2.26 | length 108.9
  Top w1.75: J11.4 143.51,224.093 147.066,220.537 R12.2 ; U2.26 153.764,156.203 159.013,161.452 159.013,168.734 159.004,168.743 159.004,174.832 J10.4
  Bottom w1.75: R12.2 147.066,197.752 158.933,185.885 158.933,185.166 163.679,180.42 J10.4
PIN_CROCO_4: J11.5 J12.1 R13.2 U2.6 | length 103.9
  Top w1.25: U2.6 135.943,159.177 135.943,182.425 J12.1 ; R13.2 138.557,220.89 140.97,223.303 J11.5
  Bottom w1.25: R13.2 141.478,204.978 J12.1
PIN_CROCO_5: J11.6 J12.2 R14.2 U2.7 | length 112.2
  Top w1.25: U2.7 137.32,158.014 137.32,181.302 J12.2 ; R14.2 130.556,220.89 138.43,228.764 J11.6
  Bottom w1.25: R14.2 130.556,196.382 139.823,187.115 139.823,186.864 140.382,186.305 140.592,186.305 141.437,185.46 J12.2
PIN_CROCO_18: J11.7 J12.3 R15.2 U2.18 | length 135.5
  Top w1.75: R15.2 122.555,213.754 128.716,219.915 128.716,228.856 135.89,236.029 J11.7 ; J12.3 140.883,182.365 140.689,182.365 139.573,181.249 139.573,148.717 152.407,135.883 U2.18
  Bottom w1.75: R15.2 122.555,203.454 128.929,197.08 128.929,195.708 138.196,186.441 138.196,186.048 141.284,182.96 J12.3
PIN_CROCO_19: J11.8 J12.4 R16.2 U2.19 | length 137
  Top w1.75: R16.2 124.395,218.248 124.395,241.87 J11.8 ; J12.4 141.478,149.988 153.043,138.423 U2.19
  Bottom w1.75: R16.2 114.046,207.698 136.319,185.425 136.319,185.27 141.129,180.46 J12.4
PIN_PI_10: M4.2 R25.2 U4.19 | length 181.8
  Top w0.75: M4.2 42.545,29.996 48.225,35.676
  Bottom w1: R25.2@48.514,36.419 48.514,41.52 50.682,43.688 159.7,43.688 170.722,54.71 170.722,79.722 U4.19
PIN_PI_12: M2.2 R21.2 U4.32 | length 280.4
  Top w0.5: R21.2 374.523,134.986 374.816,135.279 M2.2
  Top w1.25: U4.32 160.655,100.965 145.161,116.459 145.161,126.111 146.939,127.889 v1(199.009,127.889)
  Bottom w1.25: v1(199.009,127.889) 286.717,127.889 286.805,127.977 372.302,127.977 R21.2
PIN_PI_13: J22.3 R26.1 U4.33 | length 173.2
  Bottom w1.25: U4.33 167.259,103.505 193.487,77.277 278.789,77.277 290.515,89.003 290.515,102.759 288.925,104.349 R26.1 288.925,116.967 J22.3
PIN_PI_17: J24.3 U4.11 | length 237.7
  Top w1.75: U4.11 v1(173.228,75.565)
  Bottom w1.75: v1(173.228,75.565) 185.42,75.565 197.231,63.754 J24.3
PIN_PI_18: M1.2 R20.2 U4.12 | length 271.3
  Top w0.75: R20.2 377.825,30.504 383.227,35.906 384.903,35.906 M1.2
  Top w1.25: U4.12 158.974,75.565 158.242,74.833 158.242,55.626 164.211,49.657 v1(170.258,49.657)
  Bottom w1.75: v1(170.258,49.657) 367.411,49.657 377.825,39.243 R20.2
PIN_PI_21: M3.2 R24.2 U4.40 | length 137.2
  Top w0.75: M3.2 43.053,132.739 43.053,131.611 R24.2
  Bottom w1.75: R24.2 57.8,116.864 156.44,116.864 157.875,115.429 157.875,114.921 160.236,112.56 160.744,112.56 U4.40
PIN_PI_22: J26.3 U4.15 | length 243
  Top w1.75: U4.15 v1(173.228,80.645)
  Bottom w1.75: v1(173.228,80.645) 187.198,80.645 192.659,75.184 336.797,75.184 356.101,94.488 J26.3
PIN_PI_23: J27.3 U4.16 | length 137.8
  Bottom w1.25: J27.3 160.811,81.939 162.105,80.645 U4.16
PIN_PI_24: J28.3 U4.18 | length 143
  Bottom w1.25: J28.3 148.336,97.028 U4.18
PIN_PI_26: Q1.1 R28.2 U4.37 | length 132.4
  Bottom w1.25: U4.37 259.74,108.585 Q1.1 R28.2
PIN_PI_27: J25.3 U4.13 | length 237.7
  Top w1.25: U4.13 U4.13@164.739,78.085 ; v1@173.167,78.085 v1(173.187,78.064)
  Top w1.75: U4.13@164.739,78.085 v1@173.167,78.085
  Bottom w1.75: v1(173.187,78.064) 186.35,78.064 191.643,72.771 338.328,72.771 344.86,79.303 J25.3
PIN_POT_0: C5.1 J13.2 J16.1 U3.29 | length 90.8
  Top w1.25: J16.1 332.798,96.203 336.77,100.174 337.02,100.174 J13.2 337.049,100.244 338.704,101.899 338.704,107.17 336.685,109.189 C5.1 336.685,123.814 342.969,130.098 342.969,162.034 341.249,163.754 U3.29
PIN_POT_1: C6.1 J14.2 J16.2 U3.28 | length 94
  Top w1.25: J16.2 330.258,88.969 327.901,91.326 327.901,99.365 328.68,100.144 329.597,100.144 J14.2 323.104,106.694 C6.1 323.104,143.145 U3.28
PIN_POT_2: C7.1 J15.2 J16.3 U3.27 | length 90.2
  Top w1.25: J15.2 322.395,100.174 322.747,99.822 324.622,99.822 325.354,99.09 325.354,91.059 327.718,88.695 J16.3 ; C7.1 329.851,147.352 U3.27
  Bottom w1.25: J15.2 329.851,107.671 C7.1
PIN_SW_0: J3.1 J4.3 R4.1 U1.29 | length 126.1
  Top w1.25: J3.1 68.072,98.932 R4.1 86.082,116.942 86.082,151.48 U1.29
  Bottom w1.25: J4.3 90.932,171.316 U1.29
PIN_SW_1: J4.4 J5.1 R5.1 U1.28 | length 134.6
  Top w1.25: J5.1 78.3,70.005 78.3,99.381 R5.1 91.035,112.116 91.035,153.893 U1.28
  Bottom w1.25: J4.4 88.392,171.316 U1.28
PIN_SW_2: J4.5 J6.1 R6.1 U1.27 | length 124.2
  Top w1.25: J6.1 80.03,90.316 R6.1@94.358,104.644 ; R6.1 94.362,112.225 93.218,113.369 93.218,153.536 U1.27
  Bottom w1.25: J4.5 85.852,171.316 U1.27
PIN_SW_3: J4.6 J7.1 R7.1 U1.26 | length 138.5
  Top w1.25: J7.1 86.253,87.015 R7.1 103.755,104.525 103.755,105.209 95.377,113.587 95.377,153.155 U1.26
  Bottom w1.25: J4.6 83.312,171.316 U1.26
PIN_SW_4: J4.7 J8.1 R8.1 U1.6 | length 123.4
  Top w1.25: J8.1 56.408,86.497 58.259,88.348 58.259,95.112 56.007,97.364 R8.1 56.007,134.105 U1.6
  Bottom w1.25: U1.6 75.565,153.739 73.845,155.459 73.845,167.524 80.772,174.451 J4.7
PIN_SW_5: J4.8 J9.1 R9.1 U1.7 | length 129.8
  Top w1.25: J9.1 61.127,87.71 64.947,91.53 R9.1 64.947,140.505 U1.7
  Bottom w1.25: U1.7 72.468,154.22 72.468,180.037 J4.8
PIN_SW_18: J1.1 J4.1 R1.1 U1.18 | length 128.3
  Top w1.25: J1.1 94.87,85.853 R1.1 113.538,104.526 113.842,104.83 113.842,120.466 U1.18
  Bottom w1.25: J4.1 96.012,173.156 101.522,167.646 101.522,138.98 U1.18
PIN_SW_19: J2.1 J4.2 R2.1 U1.19 | length 143.3
  Top w1.25: U1.19 123.063,113.785 R2.1 ; J2.1 100.37,81.828 R2.1@123.059,104.517
  Bottom w1.25: J4.2 93.472,173.749 100.145,167.076 100.145,140.219 98.425,138.499 U1.19
Reset_Croco: R10.1 U2.4 U4.38 | length 69.2
  Top w1.25: R10.1@124.587,158.743 U2.4 ; v1(150.749,124.46) 150.749,120.015 U4.38
  Bottom w1.25: U2.4 136.525,152.647 136.525,138.684 v1(150.749,124.46)
Reset_Pot: R19.1 U3.4 U4.35 | length 176
  Top w1.25: U4.35 170.561,106.045 v1(188.976,124.46) ; R19.1@313.935,158.877 313.949,158.877 313.996,158.924 315.04,158.924 315.214,158.75 U3.4
  Bottom w1.25: v1(188.976,124.46) 189.014,124.498 189.014,125.116 217.581,153.683 296.843,153.683 302.038,158.877 R19.1
Reset_Switch: R3.1 U1.4 U4.36 | length 133.2
  Top w1.25: R3.1 70.363,158.75 70.37,158.743 U1.4 ; v1(147.447,124.46) 147.447,120.777 U4.36
  Bottom w1.25: U1.4 80.01,154.298 80.01,124.944 80.742,124.212 147.145,124.212 147.393,124.46 v1(147.447,124.46)
SCL: J19.4 R23.2 U1.9 U2.9 U3.9 U4.5 | length 544.2
  Top w1.25: U1.9 78.486,143.122 v1(78.486,123.063) ; U2.9 132.715,143.757 v1(132.715,122.428) ; U4.5@164.793,67.945 183.613,67.945 191.643,75.975 v1(191.643,124.841) ; v1(213.995,147.828) 214.049,147.828 215.827,146.05 U3.9
  Bottom w1.25: J19.4@24.765,61.214 J19.4 25.265,61.214 31.107,55.372 R23.2 40.003,55.372 41.593,56.962 91.541,56.962 95.94,52.563 165.962,52.563 168.881,55.482 168.881,65.561 166.497,67.945 U4.5 ; v1(78.486,123.063) 78.524,123.025 79.982,123.025 80.579,122.428 v1(132.715,122.428) 189.23,122.428 v1(191.643,124.841) ; 192.198,125.45 192.198,126.031 v1(213.995,147.828)
SDA: J19.3 R22.1 U1.8 U2.8 U3.8 U4.3 | length 553.3
  Top w1.25: U2.8 134.62,144.392 v1(134.62,120.824) ; U4.3 183.979,65.405 193.802,75.228 v1(193.802,124.841)
  Bottom w1.25: J19.3 R22.1 37.297,59.309 93.791,59.309 99.16,53.94 165.262,53.94 167.504,56.182 167.504,64.144 166.243,65.405 U4.3 ; U1.8 75.565,148.507 77.285,146.787 77.285,130.091 76.882,129.688 76.882,122.399 78.457,120.824 v1(134.62,120.824) ; v1@134.62,120.916 134.712,120.824 192.071,120.824 193.802,122.555 v1(193.802,124.841) 193.84,124.879 193.84,124.989 217.442,148.59 U3.8
VUSB: C1.1 C2.1 C3.1 J17.1 J18.1 J20.1 J21.1 J23.A4/B9 J23.B4/A9 J24.1 J25.1 J26.1 J27.1 J28.1 M1.5 M2.5 M3.5 M4.5 R26.2 R27.2 U1.13 U1.14 U2.13 U2.14 U3.13 U3.14 U4.2 U4.4 | length 28.2
  Top w1.75: C3.1 73.893,134.211 ; U1.14 74.697,134.211 73.893,134.211 ; U1.13 73.893,134.211 ; C2.1 129.843,133.929 U2.14 ; 129.561,134.211 128.757,134.211 U2.13 ; C1.1 317.02,134.719 ; U3.14 317.02,134.719 ; U3.13 317.218,134.719 317.02,134.719
pads on no net: J23. J23.A6 J23.A7 J23.A8 J23.B6 J23.B7 J23.B8 U1.2 U1.3 U1.11 U1.12 U1.21 U1.22 U1.24 U2.2 U2.3 U2.11 U2.12 U2.21 U2.22 U2.24 U3.2 U3.3 U3.6 U3.7 U3.11 U3.12 U3.18 U3.19 U3.21 U3.22 U3.24 U3.26 U4. U4.7 U4.8 U4.10 U4.21 U4.22 U4.23 U4.24 U4.26 U4.27 U4.28 U4.29 U4.31 U4.41 U4.42 U4.43 U4.44 U4.S1 U4.S2 U4.S4

## Polygon pours and split planes (outlines as drawn)
VUSB on Top "VUSB_L01_P015" (solid, pour order 15): -4.354,136.906 430,136.906 430,0 -1.055,0
3V3 on Top "3V3_L01_P014" (solid, pour order 14): 0,136.779 430,136.779 430,265.071 405.071,290 24.062,290 0,265.938
GND on Bottom "GND_L02_P010" (solid, pour order 10): 0,0 430,0 430,290 0,290

## Silkscreen, mask and mechanical layers (free items; w line width, h text height)
Top Overlay:
  lines w0.5: 13.843,74.168 30.607,74.168 30.607,57.912 13.843,57.912 13.843,74.168 ; 13.843,74.168 32.766,74.168 32.766,105.918 13.843,105.918 13.843,74.168 ; 20.701,25.146 49.911,25.146 49.911,44.069 20.701,44.069 20.701,25.146 ; 20.955,120.396 51.308,120.396 51.308,143.764 20.955,143.764 20.955,120.396 ; 50.673,60.071 108.966,60.071 108.966,82.169 50.673,82.169 50.673,60.071 ; 73.787,181.991 100.076,181.991 100.076,191.516 73.787,191.516 73.787,181.991 ; 129.159,247.015 155.448,247.015 155.448,256.54 129.159,256.54 129.159,247.015 ; 134.239,176.022 169.418,176.022 169.418,194.945 134.239,194.945 134.239,176.022 ; 160.528,54.71 175.133,54.71 175.133,119.38 160.528,119.38 160.528,54.71 ; 194.945,54.102 251.968,54.102 251.968,139.434 194.945,139.434 194.945,54.102 ; 208.153,14.097 232.791,14.097 232.791,48.641 208.153,48.641 208.153,14.097 ; 269.494,74.041 299.085,74.041 299.085,126.492 269.494,126.492 269.494,74.041 ; 311.658,93.726 352.044,93.726 352.044,109.474 311.658,109.474 311.658,93.726 ; 321.564,77.216 336.931,77.216 336.931,85.09 321.564,85.09 321.564,77.216 ; 371.983,125.984 401.828,125.984 401.828,144.907 371.983,144.907 371.983,125.984 ; 376.047,23.368 402.336,23.368 402.336,42.291 376.047,42.291 376.047,23.368 ; 387.096,57.658 407.924,57.658 407.924,105.537 387.096,105.537 387.096,57.658
  text "Bornes tests / Fils Bananes" at 155.448,246.507 h2 r180
  text "Bornes tests / Interrupteurs" at 100.076,181.356 h2 r180
  text "Fils Bananes" at 168.968,174.638 h3 r180
  text "Bouton Lumineux" at 298.831,129.715 h2 r180
  text "Dels addressables 2" at 401.955,125.603 h2 r180
  text "Dels addressables 3" at 51.181,119.761 h2 r180
  text "Bornier / additionnel" at 32.905,111.887 h2 r180
  text "Bornier / additionnel" at 407.924,111.379 h2 r180
  text "Potentiometres" at 352.044,92.964 h3 r180
  text "JLCJLCJLCJLC" at 213.129,92.179 h0.8 r270
  text "Bornes tests / Potentiometres" at 343.027,75.819 h2 r180
  text "Headers Raspberry Pi" at 158.499,59.693 h3 r90
  text "Interrupteurs" at 108.516,58.24 h3 r180
  text "Bornier / d'Alimentation" at 30.634,57.516 h1.52 r180
  text "Dels addressables 4" at 49.911,24.765 h2 r180
  text "Dels addressables 1" at 402.59,22.987 h2 r180
  text "Alimentation" at 232.791,13.462 h2 r180
Board Outline:
  lines w0.025: 0.021,45.416 ccw(c45.021,45.416) 45.021,0.416 385.021,0.416 ccw(c385.021,45.416) 430.021,45.416 430.021,245.035 ccw(c385.021,245.035) 385.021,290.035 45.021,290.035 ccw(c45.021,245.035) 0.021,245.035 0.021,45.416

## Text inside footprints (layer, text, board x,y; h text height)
C1: Top Overlay "+" at 313.035,134.719 h2 r270
C2: Top Overlay "+" at 125.075,133.929 h2 r270
C3: Top Overlay "+" at 70.338,134.211 h2 r270
C5: Top Overlay "+" at 336.985,113.558 h2 r180
C6: Top Overlay "+" at 323.404,113.694 h2 r180
C7: Top Overlay "+" at 330.151,113.685 h2 r180
REV1: Top Overlay "PCB REV #" at 261.239,212.823 h1 r180
SER1: Top Overlay "SERIAL #" at 253.778,212.58 h1 r180